# EAGLE board dyiofix_right (EAGLE 7.1.0)
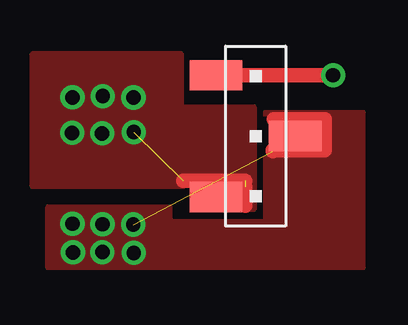
[diagram p0: board, top side]

No outline drawn. Coordinates in mm, seen from the top.
Copper layers (1*16): Top 0.035mm / dielectric 1.5mm / Bottom 0.035mm
Design rules "default": minimum track width 10mil, minimum drill 24mil, track to track 8mil, track to pad 8mil, pad to pad 8mil, via to via 8mil, smd to smd 8mil, copper to edge 40mil, drill to drill 8mil, minimum pad ring 10mil, minimum via ring 8mil, stop-mask expansion 4mil, vias tented up to drill 0mil, thermal gap 10mil

## Footprints (pad centres in the part's own frame; a part is rotated, then mirrored left to right if it is on the bottom)
HEADER = smd 1.27 x 2.2: P$1 -2.54,1.65; P$2 0,-1.65; P$3 2.54,1.65

## Placement (x,y rotation side)
E$1  [HEADER]  10.55,6.49 90 top

## Library data of the parts
E$1 = 3pinh

## Tracks (layer width: path | path; a pad name or v marks a point on that pad's centre or on a via)
RAIL  (via drill 0.6)  (1 unrouted)
  Top 0.61: 11.31,7.2 13.42,7.2 13.42,5.9 11.26,5.9 11.26,5.86
  other vias: 5.47,1.63 5.45,2.81 4.17,2.82 2.92,2.84 4.16,1.66 2.94,1.65
  pour Top: 10.99,7.47 15,7.47 15,1.02 1.91,1.02 1.91,3.54 6.95,3.54 6.95,2.92 10.99,2.92
RAW  (via drill 0.6)  (2 unrouted)
  Top 0.61: 10.11,4.38 10.11,3.59 | 10.11,4.63 7.53,4.63
  other vias: 5.47,6.66 5.46,8.1 4.15,6.61 4.18,8.16 2.92,8.11 2.9,6.63
  pour Top: 10.46,5.56 10.46,3.45 7.88,3.45 7.88,4.4 2.15,4.4 1.27,4.4 1.27,9.92 7.42,9.92 7.42,7.7 10.46,7.7
S$1
  Top 0.61: 13.77,9.02 9.04,9.02 9.04,9.03
S$2
  Top 0.61: 9.24,3.63 9.28,3.63
S$7  (via drill 0.6)
  other vias: 13.78,9.03